# Altium PCB JWB-001_Main.PcbDoc (part 1 of 2)
Units mil, origin at the board's own origin, x right, y up, seen from the top; angles counter-clockwise.
Board outline 814.38 x 826.67 mil, 4 copper layers (Top, Layer 2, Layer 3, Bottom), stack 29.66 mil thick; 83 components, 64 nets, 320 pads, 178 vias.
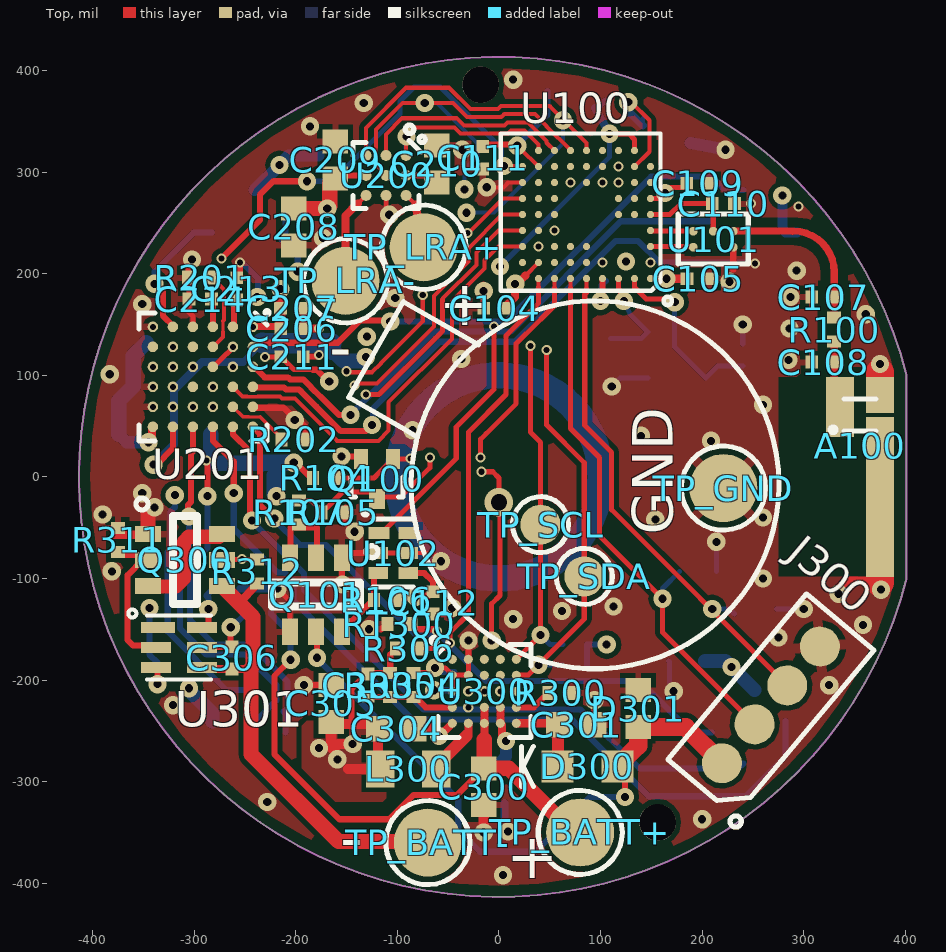
[diagram p0: Top view]
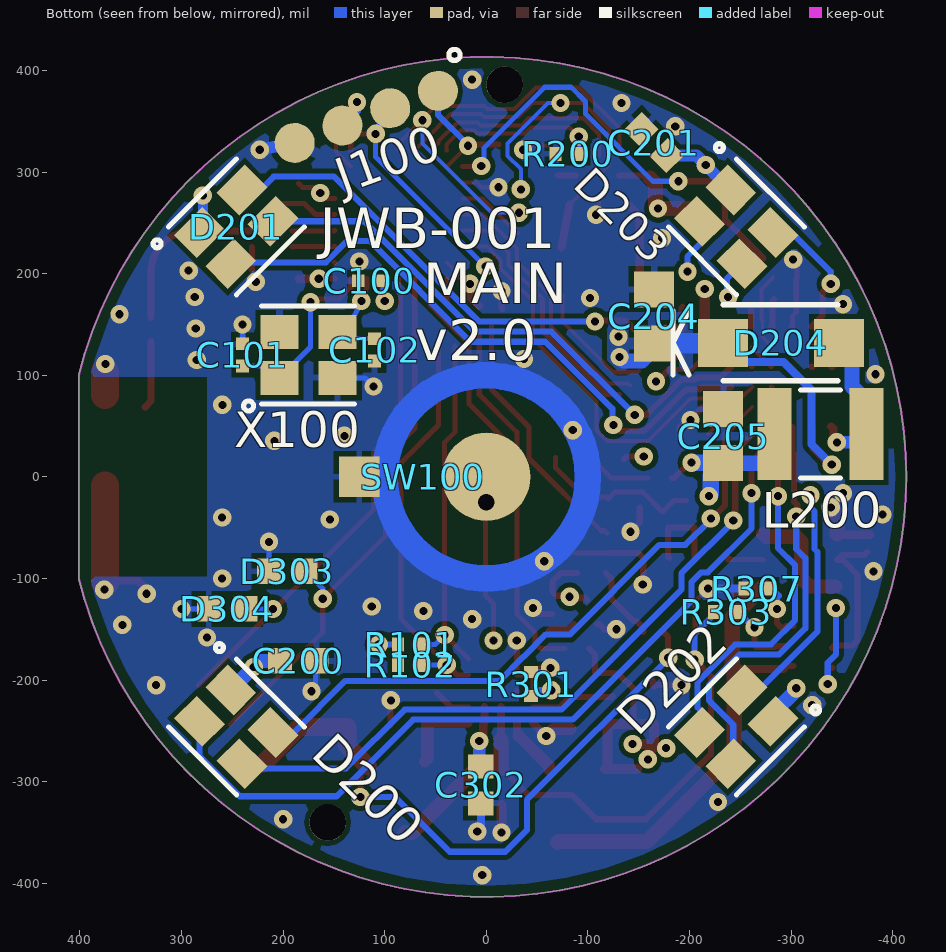
[diagram p1: Bottom view, seen from below]
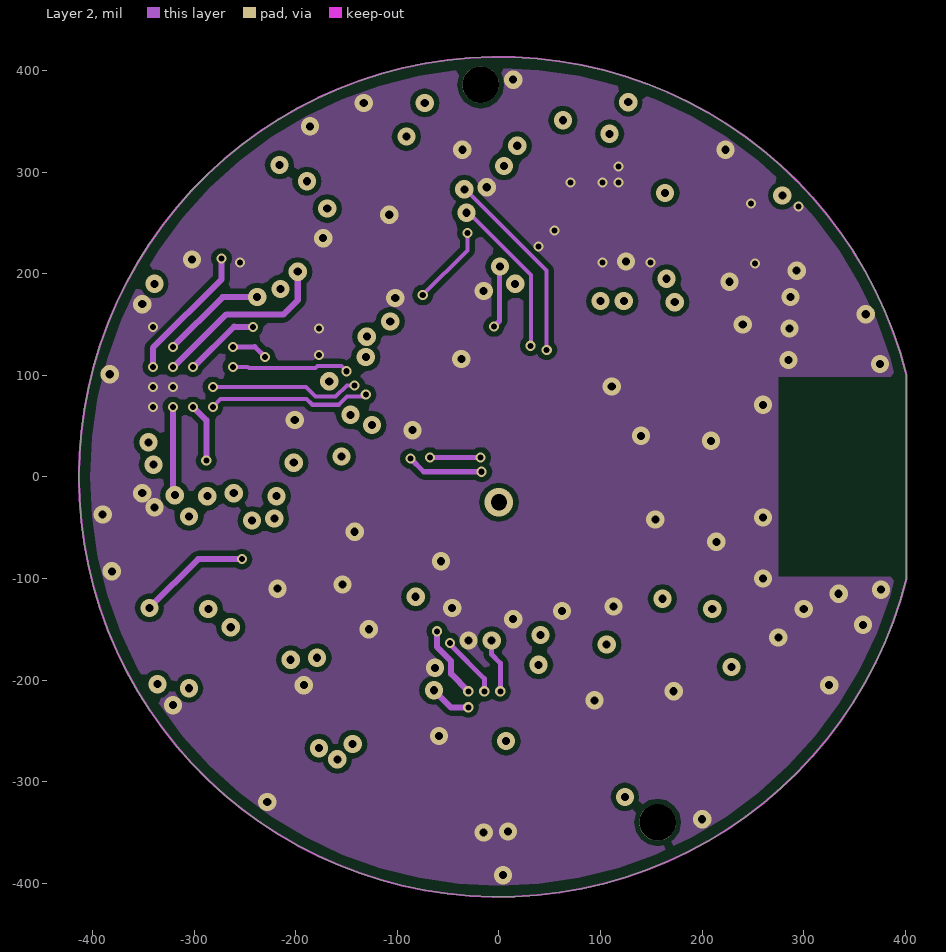
[diagram p2: Layer 2]
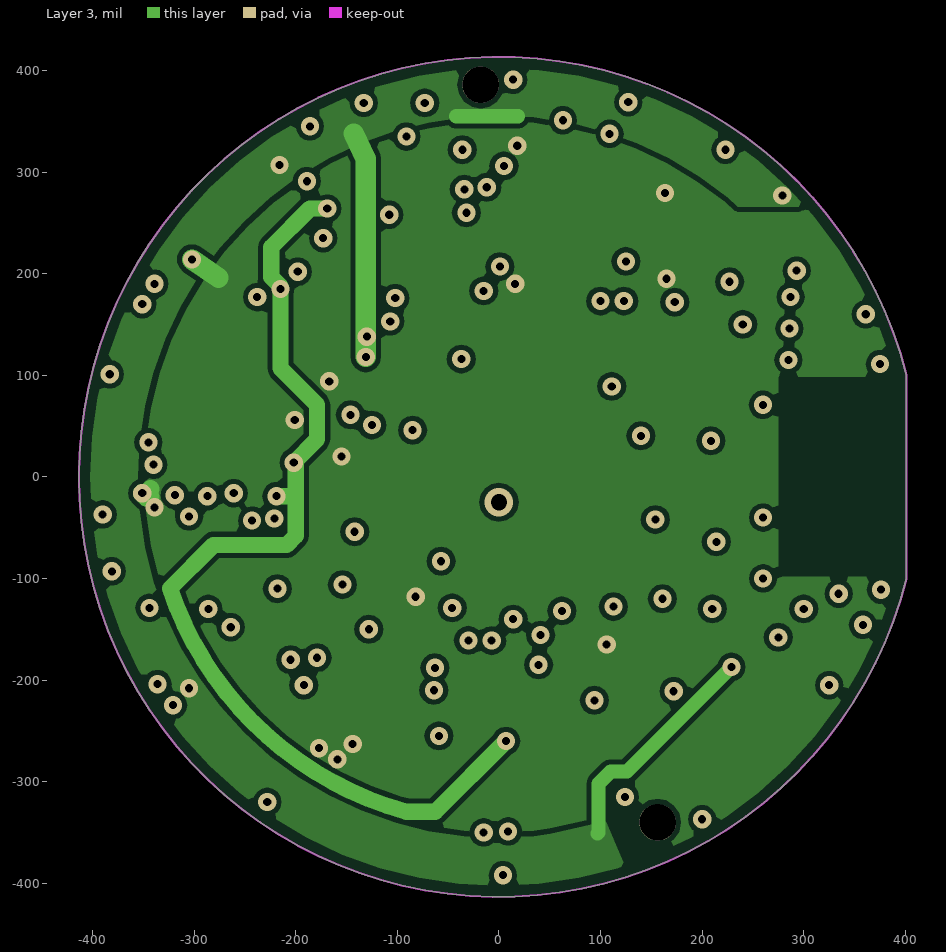
[diagram p3: Layer 3]

## Layer stack, top to bottom
Top Solder: solder mask 0.8, Solder Resist, Dk 3.5
Top: signal copper 1.25
Core 1: prepreg 3.98, 370HR, Dk 4.02
Layer 2: signal copper 0.6
Core 2: core 18, 370HR, Dk 4.3
Layer 3: signal copper 0.6
Core 3: prepreg 3.98, 370HR, Dk 4.02
Bottom: signal copper 1.25
Bottom Solder: solder mask 0.8, Solder Resist, Dk 3.5

## Board outline
401,-100.44 cw(c0,0) 401,100.44

## Design rules (kind name [scope] priority, off if disabled: settings)
Clearance Clearance_Ant [InNet('ANT_MATCH')  OR InNet ('ANT_OUT')] p1: gap=10 except(0: SMDPad-Text Fill-Text Text-Text THPad-Text Via-Text Poly-Text Track-Text Arc-Text Region-Text; 4: Arc-Arc Arc-Track Track-Track Arc-THPad SMDPad-SMDPad SMDPad-THPad Arc-SMDPad Track-SMDPad Track-THPad THPad-THPad; 6: Arc-Region Poly-Region THPad-Region Region-Region Fill-Region SMDPad-Region Via-Region Track-Region)
Clearance Clearance_U200 [InComponent('U200') OR InComponent('U201')] p2: gap=6 except(0: SMDPad-Text Fill-Text Via-Text Poly-Text Track-Text Text-Text Arc-Text Region-Text THPad-Text; 2.92: Arc-Track Arc-SMDPad Track-SMDPad Track-Track; 3: Arc-Arc Arc-Via THPad-Via Via-Via SMDPad-Via Track-Via Track-THPad Arc-THPad SMDPad-SMDPad THPad-THPad SMDPad-THPad)
Clearance Clearance_Poly [InPolygon vs (OnLayer('Keep-Out Layer'))] p3: gap=5 except(0: SMDPad-Text Fill-Text Arc-Via SMDPad-Via Track-Via Text-Text THPad-Text THPad-Via Via-Via Via-Text Poly-Text Track-Text Arc-Text Region-Text; 10: Arc-Region Track-Poly Poly-Region THPad-Region Via-Poly Region-Region THPad-Poly Fill-Poly SMDPad-Poly Arc-Poly Poly-Poly Fill-Region SMDPad-Region Via-Region Track-Region)
Clearance [All] p4: gap=4 except(0: SMDPad-Text Fill-Text Text-Text THPad-Text Via-Text Poly-Text Track-Text Arc-Text Region-Text; 5: Track-Poly Arc-Fill Via-Poly THPad-Poly Fill-Poly SMDPad-Poly Arc-Poly THPad-Fill Via-Fill Fill-Fill Poly-Poly SMDPad-Fill Track-Fill; 6: Arc-Region Poly-Region THPad-Region Region-Region Fill-Region SMDPad-Region Via-Region Track-Region)
ComponentClearance [All] p1: gap=5 collisioncheckmode=3 verticalgap=10 showdistances=FALSE
Height [All] p1: minheight=0 maxheight=1000 prefheight=100
HoleSize [All] p1: absolutevalues=TRUE maxlimit=100000 minlimit=5 maxpercent=80.000 minpercent=20.000
HoleToHoleClearance [All] p1: gap=6 allowstackedmicrovias=TRUE
MinimumSolderMaskSliver [All] p1: minsoldermaskwidth=1
PlaneClearance [InPoly] p1: clearance=6
PlaneConnect [All] p1 off: planeconnectstyle=Relief reliefexpansion=20 reliefentries=4 reliefconductorwidth=10 reliefairgap=10
PolygonConnect "PolygonConnect - U200" [InComponent('U200')] p1: connectstyle=Relief reliefconductorwidth=5 reliefentries=4 polygonreliefangle="90 Angle" airgapwidth=5
PolygonConnect ThermalVias [IsVia] p2: connectstyle=Direct reliefconductorwidth=10 reliefentries=4 polygonreliefangle="90 Angle" airgapwidth=10
PolygonConnect "PolygonConnect - Power" [InComponent('B200') OR InNet('VLED') or InNet('1V8')] p3: connectstyle=Relief reliefconductorwidth=12 reliefentries=4 polygonreliefangle="90 Angle" airgapwidth=5
PolygonConnect PolygonConnect-TP [InComponent('J100') OR InComponent('J300') OR InComponent('TP_GND')] p4: connectstyle=Relief reliefconductorwidth=10 reliefentries=4 polygonreliefangle="45 Angle" airgapwidth=6
PolygonConnect PolygonConnect-General [All] p5: connectstyle=Relief reliefconductorwidth=6 reliefentries=4 polygonreliefangle="90 Angle" airgapwidth=5
RoutingVias "Partial Vias" [((StartLayer = 'Top') And (StopLayer = 'Layer 2'))] p1: holewidth=6 width=10 viastyle="Through Hole" minholewidth=6 minwidth=10 maxholewidth=6 maxwidth=10
RoutingVias [All] p2: holewidth=8 width=18 viastyle="Through Hole" minholewidth=8 minwidth=18 maxholewidth=8 maxwidth=18
SilkToBoardRegionClearance [All] p1 off:
SilkToSilkClearance [All] p1 off: silktosilkclearance=1
SilkToSolderMaskClearance [IsPad] p1 off: minsilkscreentomaskgap=0 clearancetoexposedcopper=TRUE
SolderMaskExpansion SolderMaskExpansion_via [IsVia] p1: expansion=-10
SolderMaskExpansion [All] p2: expansion=1.97
UnpouredPolygon [All] p1: allowunpoured=FALSE
Width Width_SDA [InNet('SDA')] p1: maxlimit=10 minlimit=3 preferedwidth=5
Width [All] p2: maxlimit=100 minlimit=3 preferedwidth=6
19 further rules are at their usual default settings.

## Classes and differential pairs
component class Interfaces: C200 C201 C204 C205 C206 C207 C208 C209 C210 C211 C213 C214 D200 D201 D202 D203 D204 L200 R200 R201 R202 TP_LRA+ TP_LRA- U200 U201
component class "Top Nordic": A100 C100 C101 C102 C104 C105 C107 C108 C109 C110 C111 C112 J100 Q100 Q101 R100 R101 R102 R104 R105 R106 R107 SW100 TP_SCL TP_SDA U100 U101 U102 X100
component class "Power Supplies": C300 C301 C302 C303 C304 C305 C306 D300 D301 D303 D304 J300 L300 Q300 R300 R301 R303 R304 R305 R306 R307 R311 R312 RT300 TP_BATT+ TP_BATT- TP_GND U300 U301

## Components (designator, comment, footprint, x,y, rotation, side; value= is the part's Value field where it differs from the comment)
A100 "2450AT07A0100" 2450AT07A0100 355.43,61.02 r270 top
C100 "Cap 0201 0.1uF 6.3V0.1uF" "CAP 0201 HD" 115,193 r0 bottom
C101 "Cap 0201 11pF 25V11pF" "CAP 0201 HD" 240,120 r90 bottom
C102 "Cap 0201 11pF 25V11pF" "CAP 0201 HD" 110,125 r270 bottom
C104 "Cap 0201 0.1uF 6.3V0.1uF" "CAP 0201 HD" -4,166 r180 top
C105 "Cap 0201 1nF 25V1nF" "CAP 0201 HD" 196,195 r0 top
C107 "Cap 0201 GenericDNPDNP" "CAP 0201 HD" 319,177 r180 top
C108 "Cap 0201 GenericDNPDNP" "CAP 0201 HD" 319,113 r180 top
C109 "Cap 0201 47nF 10V47nF" "CAP 0201 HD" 195.94,288.94 r0 top
C110 "Cap 0201 2.2nF 16V2.2nF" "CAP 0201 HD" 220.94,268.94 r0 top
C111 "Cap 0201 0.1uF 6.3V0.1uF" "CAP 0201 HD" -16,314 r270 top
C112 "Cap 0201 0.1uF 6.3V0.1uF" "Cap 0201 HD" -65,-124 r270 top
C200 "Cap 0402 1.0uF 10V1.0uF" "CAP 0402 HD" 185.04,-181.1 r180 bottom
C201 "Cap 0402 1.0uF 10V1.0uF" "CAP 0402 HD" -165,329 r45 bottom
C204 "Cap 0603 10uF 10V10uF" "Cap 0603" -165,158 r90 bottom
C205 "Cap 0603 10uF 10V10uF" "Cap 0603" -233,40 r90 bottom
C206 "Cap 0201 0.1uF 6.3V0.1uF" "Cap 0201 HD" -203.66,145.86 r0 top
C207 "Cap 0201 0.1uF 6.3V0.1uF" "Cap 0201 HD" -204,166 r0 top
C208 "Cap 0402 4.7uF 10V4.7uF" "Cap 0402 HD" -202,246 r270 top
C209 "Cap 0402 1.0uF 10V1.0uF" "Cap 0402 HD" -161,312 r90 top
C210 "Cap 0402 1.0uF 10V1.0uF" "Cap 0402 HD" -61,308 r90 top
C211 "Cap 0201 0.1uF 6.3V0.1uF" "Cap 0201 HD" -203.66,118.3 r0 top
C213 "Cap 0201 1.0uF 6.3V1.0uF" "Cap 0201 HD" -258,185 r90 top
C214 "Cap 0201 0.1uF 6.3V0.1uF" "Cap 0201 HD" -294,175 r0 top
C300 "Cap 0402 4.7uF 10V4.7uF" "CAP 0402 HD" -15,-305 r270 top
C301 "Cap 0402 1.0uF 10V1.0uF" "CAP 0402 HD" 76.18,-244.09 r0 top
C302 "Cap 0402 4.7uF 10V4.7uF" "CAP 0402 HD" 5.32,-303.15 r270 bottom
C303 "Cap 0201 22pF 50V22pF" "CAP 0201 HD" -129,-205 r270 top
C304 "Cap 0402 4.7uF 10V4.7uF" "CAP 0402 HD" -100.98,-248.03 r0 top
C305 "Cap 0402 1.0uF 10V1.0uF" "Cap 0402 HD" -165,-223 r90 top
C306 "Cap 0201 0.1uF 6.3V0.1uF" "Cap 0201 HD" -262.8,-178.15 r270 top
D200 "CLMVB-FKA-CFHEHLCBB7A363" 4-PLCC 246.06,-246.06 r45 bottom locked (schematic designator D203)
D201 "CLMVB-FKA-CFHEHLCBB7A363" 4-PLCC 246.06,246.06 r315 bottom (schematic designator D202)
D202 "CLMVB-FKA-CFHEHLCBB7A363" 4-PLCC -246.06,-246.06 r135 bottom locked (schematic designator D201)
D203 "CLMVB-FKA-CFHEHLCBB7A363" 4-PLCC -246.06,246.06 r45 bottom locked (schematic designator D200)
D204 "MBR120VLSFT3G20V" SOD-123F_U -290,132 r180 bottom
D300 "CDBU05x020V" "Diode 0603 HD" 87,-285 r180 top
D301 "SESD0402P1BN-0450-0906V" "CAP 0402 HD" 137,-228 r90 top
D303 "SESD0402P1BN-0450-0906V" "CAP 0402 HD" 196,-93 r0 bottom
D304 "SESD0402P1BN-0450-0906V" "CAP 0402 HD" 255,-130 r0 bottom
J100 "SWD_Pogo_TPDNP" TP10R_1.27P-4Pin 118.11,354.33 r340 bottom
J300 "854-22-004-30-001101" HDR.050P-4Pin-SMT-R 267.72,-224.41 r50 top
L200 "Ind 1008 4.7uH 650mA4.7uH" "IND 1008" -329,42 r180 bottom
L300 "Ind 0603 2.2uH 160mA2.2uH" "IND 0603" -89.17,-287.4 r180 top
Q100 "RZM001P02" SOT-723 -120,-2 r270 top
Q101 "Si1902CDL" SC70-6 -180,-116 r270 top
Q300 "Si1902CDL" SC70-6 -309,-81.8 r0 top
R100 "Res 0201 0R Jumper0" "RES 0201 HD" 330,145 r270 top
R101 "Res 0201 3.3k 5%3.3k" "RES 0201 HD" 75,-165 r0 bottom
R102 "Res 0201 3.3k 5%3.3k" "RES 0201 HD" 75,-185 r0 bottom
R104 "Res 0201 10k 5%10k" "RES 0201 HD" -171,-1 r180 top
R105 "Res 0201 10k 5%10k" "RES 0201 HD" -163,-35 r180 top
R106 "Res 0201 10k 5%10k" "RES 0201 HD" -111,-121 r0 top
R107 "Res 0201 10k 5%10k" "RES 0201 HD" -197,-35 r90 top
R200 "Res 0201 10k 5%10k" "RES 0201 HD" -80,318 r180 bottom
R201 "Res 0201 Generic82k" "RES 0201 HD" -294,196 r0 top
R202 "Res 0201 Generic30.1k" "RES 0201 HD" -202,37 r180 top
R300 "Res 0201 Generic4.12k" "RES 0201 HD" 60.43,-212.6 r180 top
R301 "Res 0201 10k 5%10k" "RES 0201 HD" -44,-204 r270 bottom
R303 "Res 0201 330R 5%330" "RES 0201 HD" -236,-133 r0 bottom
R304 "Res 0201 150k 1%150k" "RES 0201 HD" -84,-205 r270 top
R305 "Res 0201 301k 1%301k" "RES 0201 HD" -107,-205 r90 top
R306 "Res 0201 10k 5%10k" "RES 0201 HD" -89.37,-169.05 r180 top
R307 "Res 0201 2.2k 5%2.2k" "RES 0201 HD" -266,-110 r180 bottom
R311 "Res 0201 GenericDNPDNP" "RES 0201 HD" -375,-62 r270 top
R312 "Res 0201 GenericDNPDNP" "RES 0201 HD" -238,-93 r90 top
RT300 "Res Thermal" "RES 0201 HD" -98,-145 r180 top
SW100 "GX05170" GX05170 0,0 r0 bottom
TP_BATT+ "TP" TP17R 80,-350 r90 top (schematic designator TP_VBATT)
TP_BATT- "TP" TP17R -70,-360 r90 top (schematic designator TP_GND)
TP_GND "TP" TP17R 221,-11 r90 top
TP_LRA+ "TP" TP17R -74,226 r90 top
TP_LRA- "TP" TP17R -151,193 r90 top
TP_SCL "TP" TP10R 41,-47 r90 top
TP_SDA "TP" TP10R 84,-98 r90 top
U100 "nRF51822-CFACDNP" CFAC_WLCSP 86.18,258.19 r180 top locked
U101 "BAL-NRF02D3" BGA0.4P2x3-5Pin 210.94,233.94 r0 top
U102 "FT10001L6X" DFN0.5P-6Pin -104,-75 r270 top
U200 "DRV2604L" BGA0.5P3x3-9Pin -111.07,296.75 r270 top
U201 "LP55281TL" BGA0.5P6x6-36Pin -291.34,98.43 r270 top
U300 "TPS65720" BGA0.4P5x5-25Pin -14.37,-211.05 r0 top
U301 "BQ29700" SON0.5P-6Pin -315,-168 r0 top
X100 "FA-128 16.0000MDNP" XTAL_2016 175,120 r180 bottom

## Footprints (in the part's own frame and the unit in brackets; to place one, negate y for a bottom-side part, rotate by r counter-clockwise, add the part's x,y. Pads: shape width x height; smd on the part's side, far side on the other; paste and mask are expansions set on the pad)
4-PLCC [mm] "4 Pin Plastic Leaded Chip Carrier, 2mm x 2mm"
  rect 1x0.8 smd: 1(0.75,-0.55) 2(-0.75,-0.55) 3(-0.75,0.55) 4(0.75,0.55)
  silkscreen extent -1.2,-1.2 1.8,1.2, body extent -1.05,-1.05 1.05,1.05, height 1
2450AT07A0100 [mm] "Chip Antenna, 4 pin w/keepout area"
  rect 1.5x0.7 smd paste-0.4 mask-0.4: 1(-0.2,-0.5)
  rect 4x0.7 smd paste-2 mask-2: 2(2.05,0.5)
  rect 0.9x0.7 smd paste-0.45 mask-0.45: 3(-0.5,0.5)
  Multi-Layer pour cut-out: -0.95,0.95 -0.95,-2.05 4.05,-2.05 4.05,0.95
  silkscreen extent -0.4,-0.74 0.44,0.4, body extent -0.25,-0.5 0.25,0.5, height 0.37
BGA0.4P2x3-5Pin [mm] "UFBGA, 5 pin 2 row x 3 column, .4mm x .5mm pitch,  1.385mm x .855mm"
  round 0.22 smd mask+0.05: A1(0.5,0.2) A2(0,0.2) A3(-0.5,0.2) B1(0.5,-0.2) B3(-0.5,-0.2)
  Top pour cut-out: -0.725,-0.43 0.725,-0.43 0.725,0.44 -0.725,0.44
  silkscreen extent -0.87,-0.63 0.87,0.63, body extent -0.72,-0.45 0.72,0.45, height 0.69
BGA0.4P5x5-25Pin [mil] "XBGA 0.4mm pitch, 5 row x 5 column, 25 Pin, 2mm x 2mm, TI S-XBGA-N25 YFF"
  rrect100% 9x9 smd mask+1.97: A1(-31.5,31.5) A2(-15.75,31.5) A3(0,31.5) A4(15.75,31.5) A5(31.5,31.5) B1(-31.5,15.75) B2(-15.75,15.75) B3(0,15.75) B4(15.75,15.75) B5(31.5,15.75) C1(-31.5,0) C2(-15.75,0) C3(0,0) C4(15.75,0) C5(31.5,0) D1(-31.5,-15.75) D2(-15.75,-15.75) D3(0,-15.75) D4(15.75,-15.75) D5(31.5,-15.75) E1(-31.5,-31.5) E2(-15.75,-31.5) E3(0,-31.5) E4(15.75,-31.5) E5(31.5,-31.5)
  silkscreen extent -52,-46 46,53, body extent -41,-41 41,41, height 25
BGA0.5P3x3-9Pin [mm] "DSBGA 0.5mm pitch, 3 row x 3 column, 9 Pin, 1.47mm x 1.47mm, TI S-XBGA-N9 YZF"
  round 0.275 smd paste+0 mask+0.05: A1(-0.5,0.5) A2(0,0.5) A3(0.5,0.5) B1(-0.5,0) B2(0,0) B3(0.5,0) C1(-0.5,-0.5) C2(0,-0.5) C3(0.5,-0.5)
  silkscreen extent -0.98,-0.82 0.83,0.98, body extent -0.73,-0.73 0.72,0.73, height 0.63
BGA0.5P6x6-36Pin [mm] "BGA,Pitch 0.5mm, 36 Pin 6x6, Body 3x3mm"
  round 0.265 smd paste-0.132 mask+0.05: A1(-1.25,1.25) A2(-0.75,1.25) A3(-0.25,1.25) A4(0.25,1.25) A5(0.75,1.25) A6(1.25,1.25) B1(-1.25,0.75) B2(-0.75,0.75) B3(-0.25,0.75) B4(0.25,0.75) B5(0.75,0.75) B6(1.25,0.75) C1(-1.25,0.25) C2(-0.75,0.25) C3(-0.25,0.25) C4(0.25,0.25) C5(0.75,0.25) C6(1.25,0.25) D1(-1.25,-0.25) D2(-0.75,-0.25) D3(-0.25,-0.25) D4(0.25,-0.25) D5(0.75,-0.25) D6(1.25,-0.25) E1(-1.25,-0.75) E2(-0.75,-0.75) E3(-0.25,-0.75) E4(0.25,-0.75) E5(0.75,-0.75) E6(1.25,-0.75) F1(-1.25,-1.25) F2(-0.75,-1.25) F3(-0.25,-1.25) F4(0.25,-1.25) F5(0.75,-1.25) F6(1.25,-1.25)
  silkscreen extent -1.65,-1.6 1.6,1.66, body extent -1.53,-1.53 1.53,1.53, height 0.68
"CAP 0201 HD" [mm] "Chip Capacitor, 2-Leads, Body 0.60x0.30mm, IPC High Density"
  rect 0.32x0.32 smd mask+0.05: 1(-0.28,0) 2(0.28,0)
  body extent -0.32,-0.17 0.32,0.17, height 0.33
"Cap 0201 HD" [mm] "Chip Capacitor, 2-Leads, Body 0.60x0.30mm, IPC High Density"
  rect 0.32x0.32 smd mask+0.05: 1(-0.28,0) 2(0.28,0)
  body extent -0.32,-0.17 0.32,0.17, height 0.33
"CAP 0402 HD" [mm] "Chip Capacitor, 2-Leads, Body 1.00x0.50mm, IPC Medium Density"
  rect 0.6x0.64 smd: 1(-0.46,0) 2(0.46,0)
  body extent -0.55,-0.3 0.55,0.3, height 0.6
"Cap 0402 HD" [mm] "Chip Capacitor, 2-Leads, Body 1.00x0.50mm, IPC Medium Density"
  rect 0.6x0.64 smd: 1(-0.46,0) 2(0.46,0)
  body extent -0.55,-0.3 0.55,0.3, height 0.6
"Cap 0603" [mm]
  rect 0.9x1 smd: 1(-0.675,0) 2(0.675,0)
  body extent -0.87,-0.48 0.87,0.47, height 0.85
CFAC_WLCSP [mm] "BGA, 62-Leads, Body 3.83x3.83mmx0.55mm, Pitch 0.40mm"
  round 0.18 smd mask+0.06: A1(-1.6,1.6) A2(-1.2,1.6) A3(-0.8,1.6) A4(-0.4,1.6) A5(0,1.6) A6(0.4,1.6) A7(0.8,1.6) A8(1.2,1.6) B1(-1.6,1.2) B4(-0.4,1.2) B5(0,1.2) B6(0.4,1.2) B7(0.8,1.2) B8(1.2,1.2) B9(1.6,1.2) C1(-1.6,0.8) C5(0,0.8) C6(0.4,0.8) C7(0.8,0.8) C8(1.2,0.8) C9(1.6,0.8) D1(-1.6,0.4) D7(0.8,0.4) D8(1.2,0.4) D9(1.6,0.4) E1(-1.6,0) E2(-1.2,0) E3(-0.8,0) E7(0.8,0) E8(1.2,0) E9(1.6,0) F1(-1.6,-0.4) F2(-1.2,-0.4) F3(-0.8,-0.4) F7(0.8,-0.4) F8(1.2,-0.4) F9(1.6,-0.4) G1(-1.6,-0.8) G2(-1.2,-0.8) G3(-0.8,-0.8) G4(-0.4,-0.8) G5(0,-0.8) G6(0.4,-0.8) G7(0.8,-0.8) G8(1.2,-0.8) G9(1.6,-0.8) H1(-1.6,-1.2) H2(-1.2,-1.2) H3(-0.8,-1.2) H4(-0.4,-1.2) H5(0,-1.2) H6(0.4,-1.2) H7(0.8,-1.2) H8(1.2,-1.2) H9(1.6,-1.2) J2(-1.2,-1.6) J3(-0.8,-1.6) J4(-0.4,-1.6) J5(0,-1.6) J6(0.4,-1.6) J7(0.8,-1.6) J8(1.2,-1.6)
  Top pour cut-out: -1.8,1.85 -1.8,-1.875 1.85,-1.875 1.85,1.85
  silkscreen extent -2.14,-2.02 2.14,2.26, body extent -1.78,-2 2.12,1.88, height 0.56
DFN0.5P-6Pin [mm] "Ultra Fine Dual Flat No-lead, 0.5mm Pitch 6Pin, 1.45mm x 1mm"
  rect 0.3x0.52 smd mask+0.05: 1(-0.5,-0.36)
  rect 0.3x0.49 smd mask+0.05: 2(0,-0.375) 3(0.5,-0.375) 4(0.5,0.375) 5(0,0.375) 6(-0.5,0.375)
  silkscreen extent -1.05,-0.75 0.85,0.5, body extent -0.78,-0.5 0.78,0.5, height 0.55
"Diode 0603 HD" [mm] "Chip Diode, 2-Leads, Body 1.80x1.0mm, IPC High Density"
  rect 0.8x0.8 smd: A(-0.75,0) C(0.75,0)
  silkscreen extent 1.35,-0.5 1.65,0.5, body extent -0.9,-0.5 0.9,0.5, height 0.85
GX05170 [mil] "Snap dome, 5.3mm dia"
  round 87 smd paste-50 mask+70: 1(0,0)
  rect 40x40 smd paste-40: 2(125,0)
  Top circle w26: c0,0 r100
  Top pour cut-out: -26.36,95 40,95 95,40 95,-45 45,-95 -45,-95 -95,-45 -95,47.81
  body extent -104,-104 104,104, height 10
HDR.050P-4Pin-SMT-R [mm] "Header 0.050\" Pitch, 4Pin 1 row, SMT with 1mm Round pads"
  round 1 smd mask+0.08: 1(-1.905,0) 2(-0.635,0) 3(0.635,0) 4(1.905,0)
  silkscreen extent -2.94,-1.34 2.7,1.1, body extent -2.73,-1.11 2.73,1.11, height 6.4
"IND 0603" [mm] "Chip Inductor 0603, 2-Leads, Body 1.60x0.80mm, IPC High Density"
  rect 0.71x0.92 smd: 1(-0.7,0) 2(0.7,0)
  body extent -0.9,-0.5 0.9,0.5, height 1
"IND 1008" [mm] "Inductor 1008, 2.7mm x 2.2mm"
  rect 0.85x2.3 smd: 1(-1.15,0) 2(1.15,0)
  silkscreen extent -0.5,-1.1 0.5,1.1, body extent -1.35,-1.1 1.35,1.12, height 1
"RES 0201 HD" [mm] "Resistor, 0201 High Density"
  rect 0.3x0.35 smd mask+0.05: 1(-0.3,0) 2(0.3,0)
  body extent -0.32,-0.16 0.32,0.17, height 0.26
SC70-6 [mm] "SC70-6, 6-Pin, Body 2.00x2.10mm, Pitch 0.65mm, IPC High Density"
  rect 0.66x0.4 smd: 1(-0.925,0.65) 2(-0.925,0) 3(-0.925,-0.65) 4(0.925,-0.65) 5(0.925,0) 6(0.925,0.65)
  silkscreen extent -1.22,-1.1 0.3,1.55, body extent -0.67,-1.1 0.67,1.1, height 1.1
SOD-123F_U [mm] "SOD-123F, Unidirectional, 2-Leads, Body 1.65x3.60mm, IPC High Density"
  rect 1.25x1.2 smd: A(1.45,0) C(-1.45,0)
  silkscreen extent -2.7,-0.95 1.43,0.95, body extent -1.45,-0.9 1.45,0.9, height 0.98
SON0.5P-6Pin [mm] "Small Outline No-Lead Package, 0.5pitch, 6 pin, no thermal pad, 1.5mm x 1.5mm"
  rect 0.85x0.28 smd mask+0.05: 1(-0.525,0.5)
  rect 0.75x0.28 smd mask+0.05: 2(-0.575,0) 3(-0.575,-0.5) 4(0.575,-0.5) 5(0.575,0) 6(0.575,0.5)
  silkscreen extent -1.26,-0.8 0.8,0.95, body extent -0.77,-0.78 0.77,0.77, height 0.8
SOT-723 [mm] "SOT-723, 3-Leads, 1.20mm x 1.20mm, Pitch 0.40mm, IPC High Density"
  rect 0.5x0.36 smd: 1(-0.5,0.4) 2(-0.5,-0.4)
  rect 0.5x0.4 smd: 3(0.5,0)
  silkscreen extent -0.05,-0.65 0.45,0.65, body extent -0.45,-0.65 0.45,0.65, height 0.55
TP10R [mm] "Testpoint, Round 1.0mm Dia"
  round 1 smd paste-0.5: 1(0,0)
  silkscreen extent -0.7,-0.7 0.7,0.7, body extent -0.5,-0.5 0.5,0.5, height 0.05
TP10R_1.27P-4Pin [mm] "Test Points, 1.0mm Diameter, 1.27mm(0.050\") pitch, 4 Pins"
  round 1 smd paste-2 mask+0.08: 1(-1.905,0) 2(-0.635,0) 3(0.635,0) 4(1.905,0)
  silkscreen extent -2.74,-0.84 -2.46,-0.56, body extent -2.4,-0.5 2.41,0.5, height 0.1
TP17R [mm] "Testpoint, Round 1.7mm Dia"
  round 1.7 smd paste-1: 1(0,0)
  silkscreen extent -1.05,-1.05 1.05,1.05, body extent -0.84,-0.85 0.85,0.85, height 0.05
XTAL_2016 [mm] "Crystal, 4 lead, 2.0mm x 1.6mm"
  rect 0.95x0.85 smd: 1(-0.725,-0.575) 2(0.725,-0.575) 3(0.725,0.575) 4(-0.725,0.575)
  silkscreen extent -1.63,-1.4 1.15,1.22, body extent -1.05,-0.85 1.05,0.85, height 0.5

## Part data
A100: "Utra-Minature 2.4GHz Chip antenna, 1.0mm x 0.5mm"
C100 C104 C111 C112 C206 C207 C211 C214 C306: library part "Cap 0201 0.1uF 6.3V", "Cap, Ceramic 0.1uF 6.3V 10% X5R  0201"
C101 C102: library part "Cap 0201 11pF 25V", "Cap, Ceramic 11pF 25V 5% NPO  0201"
C105: library part "Cap 0201 1nF 25V", "Cap, Ceramic 1nF 25V 10% X7R  0201"
C107 C108: library part "Cap 0201 Generic", "Capacitor, Ceramic 0201"
C109: library part "Cap 0201 47nF 10V", "Cap, Ceramic 47nF 10V 10% X5R  0201"
C110: library part "Cap 0201 2.2nF 16V", "Cap, Ceramic 2.2nF 16V 10% X7R  0201"
C200 C201 C209 C210 C301 C305: library part "Cap 0402 1.0uF 10V", "Cap, Ceramic 1.0uF 10V 10% X5R 0402"
C204 C205: library part "Cap 0603 10uF 10V", "Cap, Ceramimic 10uF 10V 20% X5R 0603"
C208 C300 C302 C304: library part "Cap 0402 4.7uF 10V", "Cap, Ceramic 4.7uF 10V 20% X5R 0402"
C213: library part "Cap 0201 1.0uF 6.3V", "Cap, Ceramic 1.0uF 6.3V 20% X5R  0201"
C303: library part "Cap 0201 22pF 50V", "Cap, Ceramic 22pF 50V 5% NPO  0201"
D200 D201 D202 D203: "RGB LED SMD, Diffused"
D204: library part MBR120VLSFT3G, "Diode, Schottky, 20V 1A SOD-123F, 340mV Vf @ 1A"
D300: library part CDBU05x0, "Diode, Schottky, 20V 500mA, 470mV Vf @ 500mA, 0603"
D301 D303 D304: library part SESD0402P1BN-0450-090, "ESD TVS Diode, 16kV air, 0402"
J100: library part SWD_Pogo_TP, "Test points for 4-wire Serial Wire Debugger header Pogo Pin harness"
J300: "Spring Loaded Header 0.05\" Pitch, 4Pin, 4x1, 4.98mm - 6.4mm Height"
L200: library part "Ind 1008 4.7uH 650mA", "Inductor, 4.7uH, 1008"
L300: library part "Ind 0603 2.2uH 160mA", "Inductor, 2.2uH 160mA, 0603"
Q100: "P-MOSFET, 20V 100mA, SOT-723"
Q101 Q300: "Dual N-MOSFET, 20V 1A, SC70-6"
R100: library part "Res 0201 0R Jumper", "Resistor 0 ohm  1/20W, 0201"
R101 R102: library part "Res 0201 3.3k 5%", "Resistor 3.3k ohm 5% 1/20W, 0201"
R104 R105 R106 R107 R200 R301 R306: library part "Res 0201 10k 5%", "Resistor 10k ohm 5% 1/20W 0201"
R201 R202 R311 R312: library part "Res 0201 Generic", "Resistor, 0201"
R300: library part "Res 0201 Generic", "RES SMD 4.12K OHM 1% 1/20W 0201"
R303: library part "Res 0201 330R 5%", "Resistor 330 ohm 5% 1/20W, 0201"
R304: library part "Res 0201 150k 1%", "Resistor 150k ohm  1% 1/20W, 0201"
R305: library part "Res 0201 301k 1%", "Resistor 301k ohm 1% 1/20W, 0201"
R307: library part "Res 0201 2.2k 5%", "Resistor 2.2k ohm 5% 1/20W, 0201"
RT300: library part "Therm 0201 10k NTC", "Thermistor 10k ohm NTC 5% 0201"
SW100: "Snap Dome, high activation force, 5.3mm dia"
TP_BATT+ TP_BATT- TP_GND TP_LRA+ TP_LRA-: library part TP17R, "Testpoint, Round 1.7mm Dia"
TP_SCL TP_SDA: library part TP10R, "Testpoint, Round 1.0mm Dia"
U100: library part nRF51822-CFAC, "Multiporotocol Bluetooth low energy/2.4GHz RF System on Chip"
U101: "Balun, 50 ohm transformer for nRF51x22"
U102: "Reset Timer with 10.0sec Fixed Delay and Reset Pulse, 1.65v-5.0v"
U200: "Haptic Driver w/Internal Memory, I2C, DSBGA 9"
U201: "Quad RGB LED driver w/integrated boost supply and audio sync"
U300: "PMU for Li-ion batteries, 1xDCDC 1xLDO, .4mm pitch XBGA 2mm x 2mm"
U301: "Li-Ion single cell voltage and current protection IC"
X100: library part "FA-128 16.0000M", "Crystal, 16.0000MHz, 10ppm, 2.0mm x 1.6mm"

## Free pads (board coordinates)
  round 35.98 hole 35.98 unplated: 0(-18,386) 0(156.19,-340.11)

## Via types
v1: diameter 18, hole 8, Top to Bottom, 126 vias
v2: diameter 10, hole 6, Top to Layer 2, 51 vias
v3: diameter 28, hole 16, Top to Bottom, 1 vias

## Nets (pads, with @x,y where several pads share a name; then routed paths per layer and width w, separated by ;. In a path a pad name is that pad's centre, name@x,y a point inside that pad or via, vN(x,y) a via of type N, cw(c..) or ccw(c..) an arc to the next point about the centre after c; other vN are vias at no path point)
1V8: C104.1 C105.1 C109.1 C111.1 C112.1 C211.1 C303.1 C304.1 C305.1 J100.1 L300.2 Q100.2 R101.2 R102.2 R106.2 R305.2 R306.2 U100.A1 U100.B8 U100.F1 U100.H8 U102.4 U201.B2 U201.C3 | length 814.6
  Top w4: v1@20.94,322.94 21.43,322.94 U100.H8@38.94,305.43 ; 25.94,197.95 U100.B8@38.94,210.95
  Top w5: U201.C3@-280.43,108.46 -280.43,108.86 -268.54,120.75 -268.14,120.75 -261.81,127.08 v2(-261.81,127.95) ; v2(-230.32,118.11) -214.87,118.11 C211.1@-214.69,118.3 -214.43,118.3 -201.63,105.5 -182.97,105.5 ; U100.F1@149.17,273.94 157.94,273.94 v1(163.5,279.5) 168.94,284.94 180.92,284.94 C109.1@184.92,288.94
  Top w6: -182.97,105.47 -179.47,105.47 -168,94 v1(-167,94) ; v1@-158,20.57 -158,19.89 -137.95,19.89 Q100.2@-135.75,17.68 ; -145,-243.11 -145,-208.64 -130.06,-193.7 -124.61,-193.7 -123.82,-192.91 R305.2@-108,-192.91 ; R305.2@-107,-193.19 -107,-174.88 R306.2@-101.18,-169.05 ; R106.2@-99.19,-121 -97.19,-119 -83,-119 v1(-82,-118) -82,-114 -79,-117 -69.02,-117 C112.1@-65,-112.98 -65,-103 -73.32,-94.68 U102.4@-89.24,-94.68 ; C111.1@-11.98,327 v1@16.88,327 ; v1@14.44,329.44 v1@16.88,327 ; v1@20.94,322.94 v1(18,325.88) v1@16.88,327 ; U100.A1@149.17,195.2 v1@164.8,195.2
  Top w8: C104.1@7,168 16,177 16,187.99 25.94,197.93 ; v1@164.8,195.2 v1(165,195) C105.1@184.98,195
  Top w10: -148.4,-287.4 L300.2@-116.73,-287.4 -119.09,-285.04 C304.1@-119.09,-248.03 -124.02,-243.11 -165,-243.11 -165,-266 -163,-268 -158,-263 v1(-144,-263)
  Layer 2 w5: v2(-261.81,127.95) -240.54,127.95 -240.35,128.14 v2(-230.32,118.11)
  Bottom w6: v1(18,325.88) 18,326.63 47.63,356.26 J100.1@47.63,379.98 ; R102.2@86.81,-185 R101.2@86.81,-165 v1(106,-165)
  other v1: -159,-278 -177,-267 -155,20 16,190
5V: D300.A D301.1 J300.1 Q101.5 | length 626.4
  Top w6: v1(-179,-178) -179,-157.42 Q101.5@-175,-153.42 ; D300.A@116.53,-285 124,-292.47 v1(124,-315)
  Top w18: D300.A@116.53,-285 137,-264.53 D301.1@137,-246.11 183.75,-246.11 J300.1@219.51,-281.86
  Bottom w6: v1(-179,-178) -179,-179 -40,-318 -40,-347.63 -18.63,-369 36,-369 90,-315 v1(124,-315)
\LED_CS: U100.D9 U201.C5 | length 409.1
  Top w4: -63.5,135.5 -63.5,136.48 ; -55.34,174.64 -55.34,175.34 -22,208.69 -22,221 -0.56,242.44 U100.D9@23.19,242.44
  Top w5: v2(-281.5,68.9) -280.51,68.9 -280.43,68.98 U201.C5@-280.43,69.09 ; v2(-131,81) -118,81 -63.5,135.5 -55.34,143.66 -55.34,174.64
  Layer 2 w4: v2(-281.5,68.9) -273.89,76.5 -189.23,76.5 -183.73,71 -157.33,71 -149.33,79 -133,79 v2(-131,81)
\LED_RST: U100.H9 U201.F3 | length 564.8
  Top w5: v1(5,306) 5.57,305.43 U100.H9@23.19,305.43
  Top w6: v2(-340.55,108.27) -339.57,108.27 -339.49,108.35 U201.F3@-339.49,108.46 ; v2(-273,215) -235,253 -235,278 -222,291 v1(-189,291)
  Layer 2 w6: v2(-340.55,108.27) -340.55,126.97 -273,194.52 v2(-273,215)
  Bottom w5: v1(-189,291) -163.89,291 -97.5,357.39 -97.5,369.5 -83.5,383.5 -57.5,383.5 2.5,323.5 2.5,308.5 v1(5,306)
\PB_IN: Q100.1 R104.1 SW100.1 U300.C4 | length 392.9
  Top w5: R104.1@-159.19,-1 -123,-1 -118,4 -117.94,4 Q100.1@-104.25,17.68 -87.32,17.68 v2(-87,18) ; v2(-17,5) -6,5 0,-1 v3(0,-25) 1,-25 1,-116.73 -7.14,-124.86 v1(-7.14,-161.14)
  Layer 2 w5: v2(-87,18) -74,5 v2(-17,5) ; v1(-7.14,-161.14) -7.14,-174.86 1.38,-183.38 v2(1.38,-211.05)
\RESET: J100.2 U100.J2 U102.1 | length 576.2
  Top w5: U102.1@-118.76,-55.31 -116.45,-53 -113,-53 -42,18 -42,49 -5,86 v2(-5,148) ; v1(108.92,337.59) 127.84,337.59 133.42,332 U100.J2@133.42,321.18
  Layer 2 w5: v2(-5,148) 0.5,153.5 v1@0.5,202.5
  Bottom w5: v1(1,207) 109,315 v1@109,337.59
  Bottom w6: J100.2@94.62,362.88 J100.2@99.85,368.11 ; J100.2@95.58,361.2 104.38,370 104.7,369.68 106.01,371 107.33,369.68 107.64,370 J100.2@107.96,369.68
  Bottom w8: J100.2@94.62,362.88 95.58,361.2 104.5,345.5 v1@108.98,337.62
ANT_MATCH: A100.1 C108.1 R100.2 | length 66.7
  Top w7: R100.2@330,133.19 C108.1@330.02,113 330.02,74.62 A100.1@335.75,68.9
ANT_OUT: C107.1 R100.1 U101.A1 | length 167.3
  Top w7: U101.A1@230.63,241.81 288.99,241.81 ; 290.12,241.81 cw(c290.12,201.89) 330.04,201.89 ; R100.1@330,156.81 C107.1@330.02,177 330.02,201.87 ; 330,201.89 330,203
BLUE1: D200.2 U201.A6 | length 619.8
  Top w6: U201.A6@-242.13,49.21 -235,42.09 -235,-28 -221,-42 v1(-221,-41)
  Bottom w6: v1(-221,-41) -221,-42 -196,-67 -170.37,-67 -82.37,-155 -58.63,-155 -36.63,-177 -36.5,-177 -12.5,-201 45.63,-201 45.84,-200.79 138.79,-200.79 189.63,-251.63 D200.2@209.87,-251.63
BLUE2: D201.2 U201.A2 | length 557.2
  Top w6: U201.A2@-241.06,128.14 -239.09,130.11 -231.89,130.11 -230,132 -158.63,132 -136.63,154 -108,154 v1(-107,153)
  Bottom w6: v1(-107,153) 7.33,153 149.83,295.5 209.43,295.5 222.67,282.25 D201.2@240.5,282.25
BLUE3: D202.2 U201.D6 | length 411
  Top w6: v1(-305,-39) -306,-38 -306,-27.63 -303,-24.63 -303,23 -301.18,24.82 U201.D6@-301.18,49.21 ; U201.D6@-300.12,49.21 U201.D6@-300.12,49.4
  Bottom w6: v1(-305,-39) -305,-71 -314,-80 -314,-149 -288,-175 -249,-175 -219,-205 -219,-220 -243,-244 -243,-279.75 D202.2@-240.49,-282.25
BLUE4: D203.2 U201.E1 | length 134.8
  Top w6: v1(-339,190) -330.71,181.71 -330.71,158.73 U201.E1@-319.8,147.83
  Bottom w6: v1(-339,190) -339,202 -300.51,240.49 D203.2@-282.25,240.49
BUTTON: Q100.3 R105.2 R107.2 U100.A7 | length 424.7
  Top w4: 54.68,186.32 U100.A7@54.68,195.2
  Top w5: R107.2@-197,-23.19 -184.81,-23.19 -173.5,-34.5 -154,-15 -126.68,-15 Q100.3@-121.68,-20 ; Q100.3@-120,-21.68 Q100.3@-121.68,-20 ; v2(-68,19) -68,9 -97,-20 Q100.3@-121.68,-20 ; v2(-18,19) -18,37.06 -12.53,42.53 17,72.06 17,131.26 26.24,140.5 26.5,140.5 54.68,168.68 54.68,186.32
  Layer 2 w5: v2(-68,19) v2(-18,19)